# EAGLE board Copy of Glorious Esboo (EAGLE 9.7.0)

Size 91.66 x 95.35 mm. Coordinates in mm from the lower left corner, seen from the top.
Outline: 0,0 91.66,0 91.66,95.35 0,95.35 0,0
Copper layers (1*16): Top 0.035mm / dielectric 1.5mm / Bottom 0.035mm
Design rules "default": minimum track width 6mil, minimum drill 0.35mm, track to track 6mil, track to pad 6mil, pad to pad 6mil, via to via 6mil, smd to smd 6mil, copper to edge 40mil, drill to drill 6mil, minimum pad ring 10mil, minimum via ring 8mil, stop-mask expansion 4mil, vias tented up to drill 0mil, thermal gap 10mil

## Footprints (pad centres in the part's own frame; a part is rotated, then mirrored left to right if it is on the bottom)
LEDRD254W60D565H860B = drill 0.981 pad 1.581: 1 -1.27,0; 2 1.27,0
BATTERY-GENERIC = drill 1.118 pad 3.15 octagon: + 2.54,0; - -2.54,0
RESAD1016W63L850D250B = drill 0.83 pad 1.43: 1 -5.08,0; 2 5.08,0
SWITCH-MOMENTARY-PTH-6.5MM = drill 1.016 pad 1.88: 1 -3.251,2.261; 2 3.251,2.261; 3 -3.251,-2.261; 4 3.251,-2.261
SWITCH-SPDT-PTH-8.5X3.7MM = drill 1.016 pad 1.88: 1 -2.54,0; 2 0,0; 3 2.54,0
DIP762W53P254L1969H508Q14B = drill 0.743 pad 1.343: 1 -3.81,7.62; 2 -3.81,5.08; 3 -3.81,2.54; 4 -3.81,0; 5 -3.81,-2.54; 6 -3.81,-5.08; 7 -3.81,-7.62; 8 3.81,-7.62; 9 3.81,-5.08; 10 3.81,-2.54; 11 3.81,0; 12 3.81,2.54; 13 3.81,5.08; 14 3.81,7.62

## Placement (x,y rotation side)
D1  RED  [LEDRD254W60D565H860B]  85.6,34.37 180 top
P1  BATTERYGENERIC  [BATTERY-GENERIC]  8.26,87.1 180 top
R1  1k  [RESAD1016W63L850D250B]  74.17,47.07 90 top
R2  220  [RESAD1016W63L850D250B]  84.33,26.75 90 top
R3  1k  [RESAD1016W63L850D250B]  30.99,26.75 90 top
R5  1k  [RESAD1016W63L850D250B]  20.83,26.75 90 top
R6  1k  [RESAD1016W63L850D250B]  38.61,8.97 90 top
S1  SWITCH_MOMENTARY  [SWITCH-MOMENTARY-PTH-6.5MM]  41.15,28.02 90 top
S2  TOGGLE  [SWITCH-SPDT-PTH-8.5X3.7MM]  18.29,19.13 0 top
S3  TOGGLE  [SWITCH-SPDT-PTH-8.5X3.7MM]  28.45,19.13 0 top
S4  SWITCH_MOMENTARY  [SWITCH-MOMENTARY-PTH-6.5MM]  71.63,28.02 90 top
U1  74HC73_PDIP  [DIP762W53P254L1969H508Q14B]  56.39,28.02 90 top

## Library data of the parts
D1 = Tinkercad; CATEGORY: Opto-Electronic; SUB-CATEGORY: LED; VALUE: LED_RED
P1 R1-R3 R5 R6 S1-S4 U1 = Tinkercad

## Nets
D1_C: D1.2 R2.2
P1+: D1.1 P1.+ R6.1 S2.2 S3.2 S4.1 S4.2 U1.4
P1-: P1.- R1.2 R3.2 R5.2 S1.3 S1.4 U1.11
U1_1Q: R2.1 U1.12
U1_CLK1: R1.1 S4.3 S4.4 U1.1
U1_J1: R5.1 S2.3 U1.14
U1_K1: R3.1 S3.3 U1.3
U1_R1: R6.2 S1.1 S1.2 U1.2

## Tracks (layer width: path | path; a pad name or v marks a point on that pad's centre or on a via)
D1_C  (1 unrouted)
P1+  (7 unrouted)
P1-  (6 unrouted)
U1_1Q  (1 unrouted)
U1_CLK1  (3 unrouted)
U1_J1  (2 unrouted)
U1_K1  (2 unrouted)
U1_R1  (3 unrouted)